# EAGLE board UpTo11.FrontPanel (EAGLE 9.6.2)
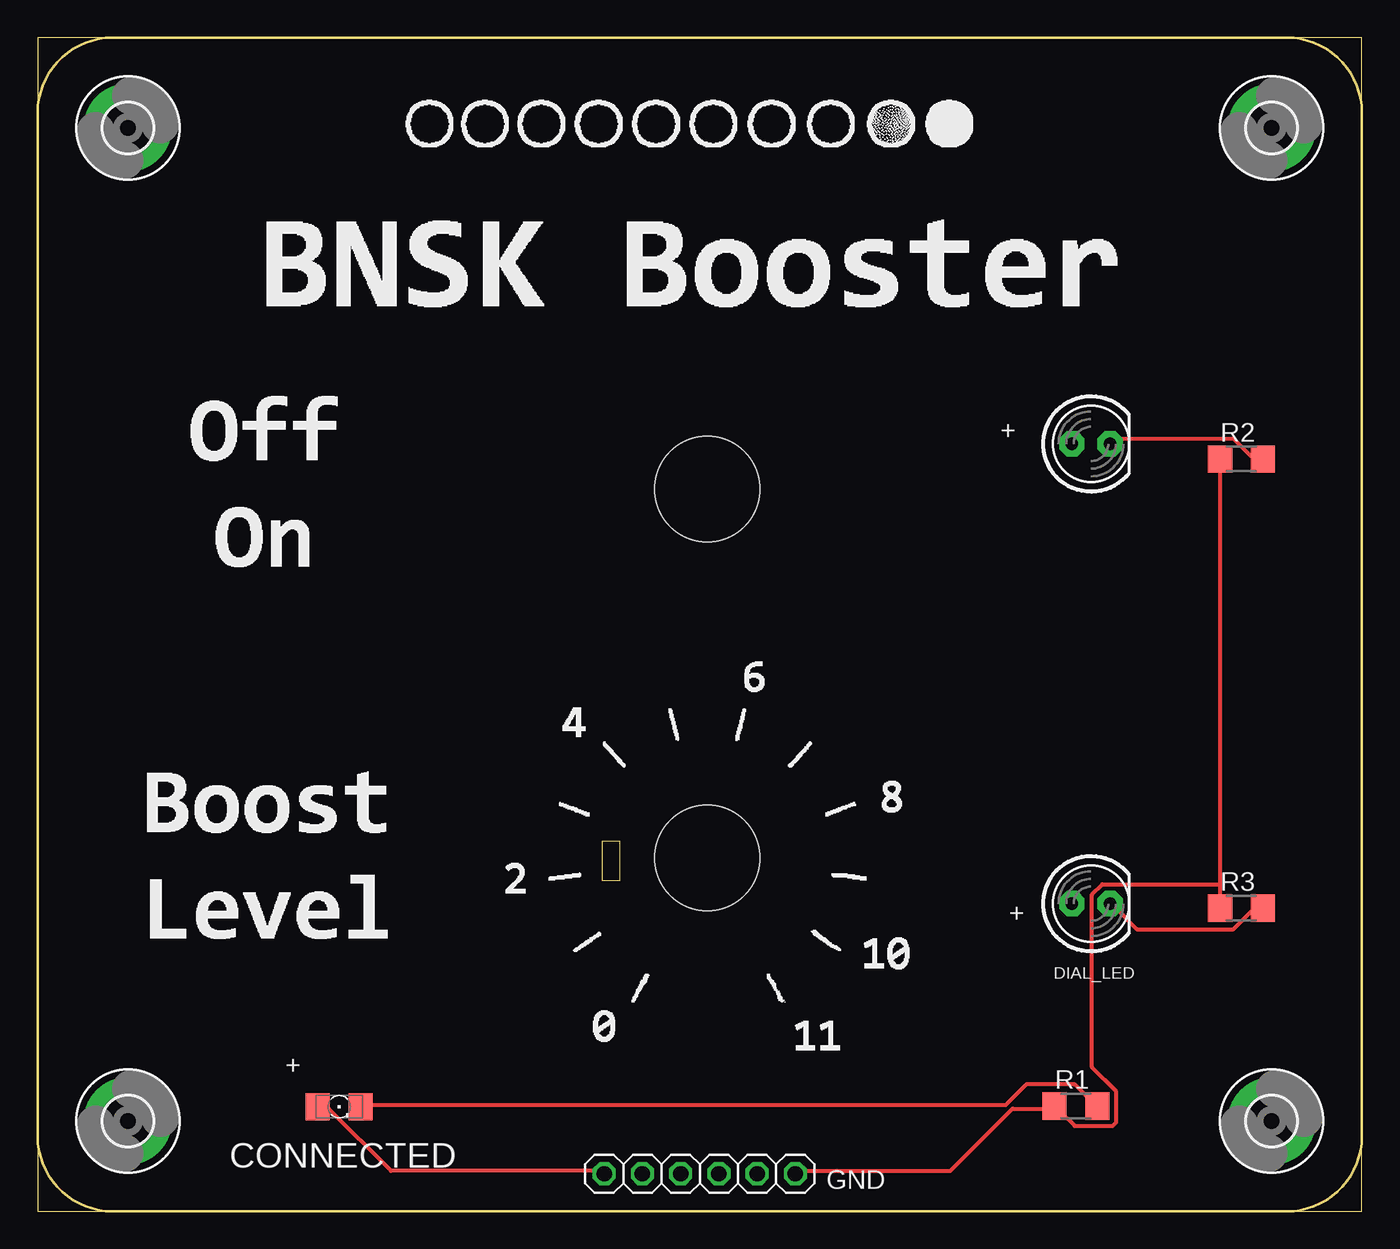
[diagram p0: board, top side]
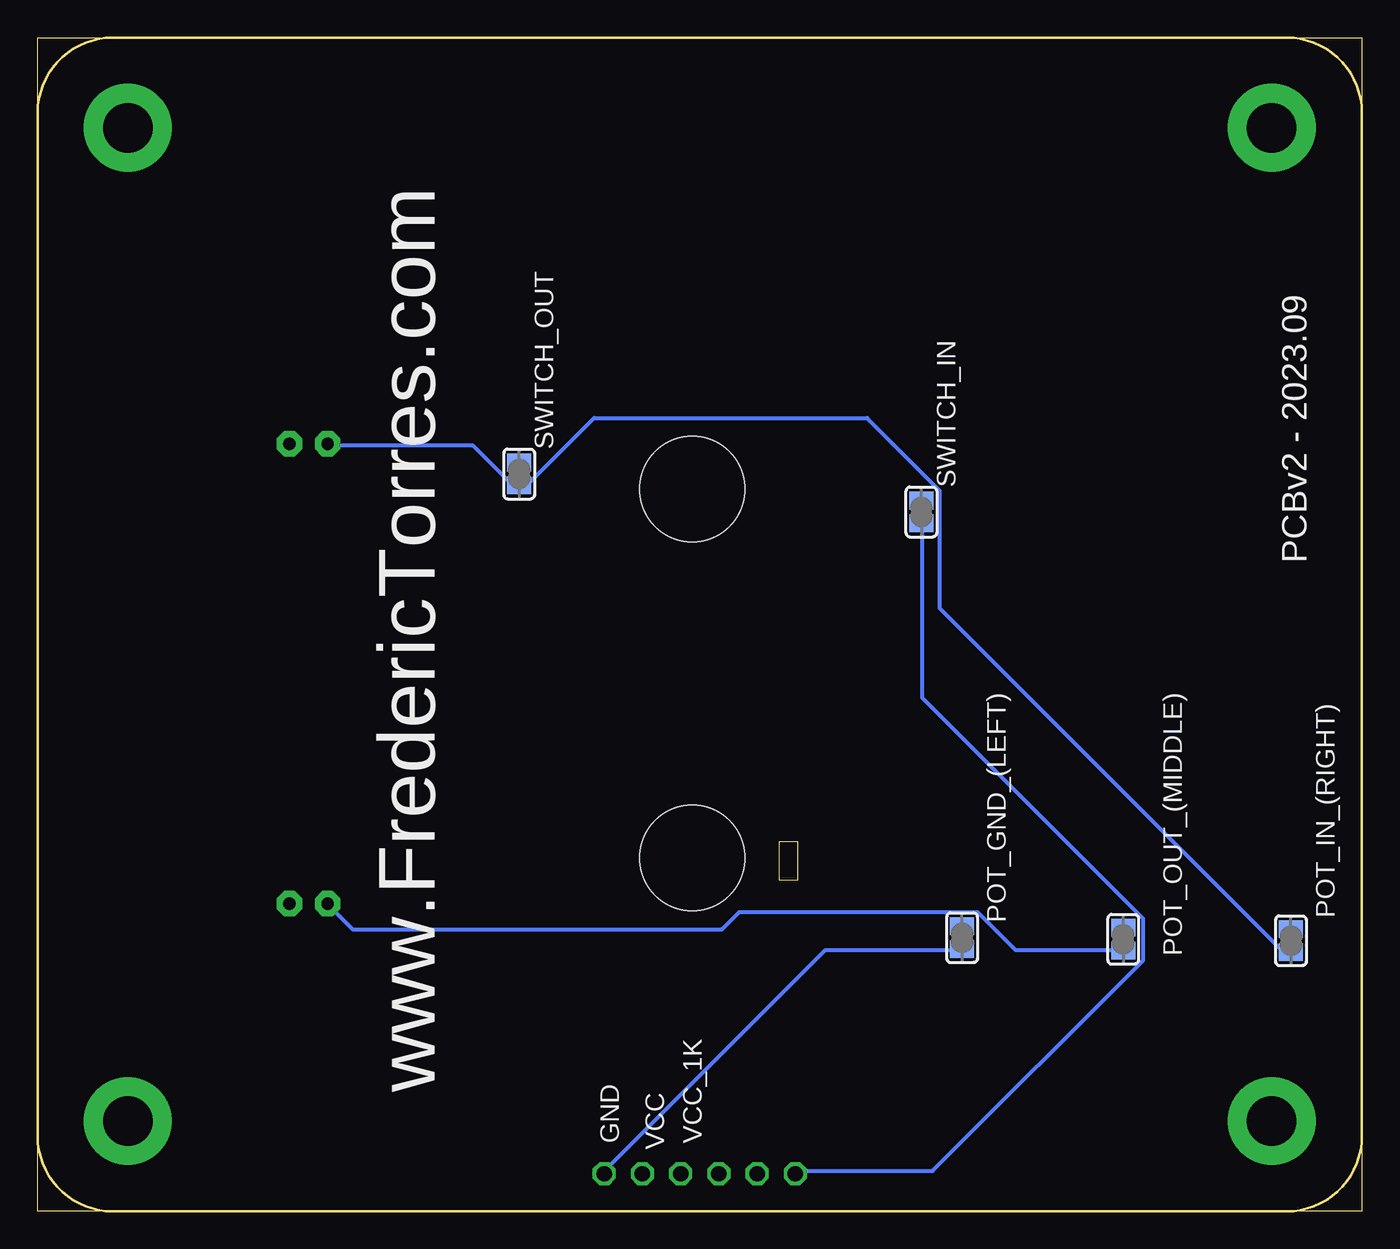
[diagram p1: board, bottom side, seen from below]

Size 88 x 78 mm. Coordinates in mm from the lower left corner, seen from the top.
Outline: 5,0 0,0 0,5
Outline: 83,0 88,0 88,5
Outline: 88,73 88,78 83,78
Outline: 5,78 0,78 0,73
Outline: 0,5 0,73
Outline: 0,73 arc-90 5,78
Outline: 5,78 83,78
Outline: 83,78 arc-90 88,73
Outline: 88,73 88,5
Outline: 88,5 arc-90 83,0
Outline: 83,0 5,0
Outline: 5,0 arc-90 0,5
Copper layers (1*16): Top 0.035mm / dielectric 1.5mm / Bottom 0.035mm
Design rules "default": minimum track width 10mil, minimum drill 24mil, track to track 8mil, track to pad 8mil, pad to pad 8mil, via to via 8mil, smd to smd 8mil, copper to edge 40mil, drill to drill 8mil, minimum pad ring 10mil, minimum via ring 8mil, stop-mask expansion 4mil, vias tented up to drill 0mil, thermal gap 10mil
Net classes: 0 default: clearance 0.205 mm
Holes 7 mm at 44.5,23.5 44.5,48
Milling: area 37.5,22 to 38.7,24.6

## Footprints (pad centres in the part's own frame; a part is rotated, then mirrored left to right if it is on the bottom)
LED5MM = drill 0.813 pad 1.676 octagon: A -1.27,0; K 1.27,0
1206 = smd 1.6 x 1.803: A -1.422,0; C 1.422,0
1X06 = drill 1.016 octagon: 1 -6.35,0; 2 -3.81,0; 3 -1.27,0; 4 1.27,0; 5 3.81,0; 6 6.35,0
3,3-PAD = drill 3.3 pad 5.842: B3,3 0,0
SOLDERJUMPER_REFLOW = smd 1.168 x 1.6: 1 -0.762,0; 2 0.762,0
R1206 = smd 1.6 x 1.803: 1 -1.422,0; 2 1.422,0

## Placement (x,y rotation side)
BOOSTER_ON_LED  [LED5MM]  70,51 0 top
CONNECTED  [1206]  20.04,6.96 0 top
DIAL_LED  [LED5MM]  70,20.44 0 top
FRONT_PANEL_INTERFACE  [1X06]  44,2.5 180 top
H1  MOUNT-PAD-ROUND3.3  [3,3-PAD]  6,72 0 top
H2  MOUNT-PAD-ROUND3.3  [3,3-PAD]  82,72 0 top
H3  MOUNT-PAD-ROUND3.3  [3,3-PAD]  82,6 0 top
H4  MOUNT-PAD-ROUND3.3  [3,3-PAD]  6,6 0 top
POT_GND_(LEFT)  [SOLDERJUMPER_REFLOW]  26.57,18.18 270 bottom
POT_IN_(RIGHT)  [SOLDERJUMPER_REFLOW]  4.71,17.98 270 bottom
POT_OUT_(MIDDLE)  [SOLDERJUMPER_REFLOW]  15.86,18.08 270 bottom
R1  [R1206]  69,7 0 top
R2  [R1206]  80,50 0 top
R3  [R1206]  80,20.15 0 top
SWITCH_IN  [SOLDERJUMPER_REFLOW]  29.27,46.48 270 bottom
SWITCH_OUT  [SOLDERJUMPER_REFLOW]  56,49 270 bottom

## Library data of the parts
BOOSTER_ON_LED CONNECTED DIAL_LED FRONT_PANEL_INTERFACE R1-R3 = adafruit
H1-H4 = holes
POT_GND_(LEFT) POT_IN_(RIGHT) POT_OUT_(MIDDLE) SWITCH_IN SWITCH_OUT = microbuilder

## Nets
BOOSTER_ON: BOOSTER_ON_LED.A POT_IN_(RIGHT).2 SWITCH_OUT.2
DIAL_INPUT: DIAL_LED.A POT_OUT_(MIDDLE).2
GND_EX: FRONT_PANEL_INTERFACE.1 POT_GND_(LEFT).2 R1.1 R2.1 R3.1
N$1: CONNECTED.C R1.2
N$2: BOOSTER_ON_LED.K R2.2
N$3: DIAL_LED.K R3.2
VCC: CONNECTED.A FRONT_PANEL_INTERFACE.6 SWITCH_IN.2

## Tracks (layer width: path | path; a pad name or v marks a point on that pad's centre or on a via)
BOOSTER_ON
  Bottom 0.254: POT_IN_(RIGHT).2 4.88,17.38 5.34,17.38 28.06,40.1 28.06,47.9 32.88,52.72 51.01,52.72 55.38,48.36 55.83,48.36 SWITCH_OUT.2 56.06,48.36 56.52,48.36 59.05,50.88 68.69,50.88 BOOSTER_ON_LED.A
DIAL_INPUT
  Bottom 0.254: POT_OUT_(MIDDLE).2 15.9,17.38 23.02,17.38 25.54,19.9 41.38,19.9 42.52,18.75 67.08,18.75 68.69,20.36 DIAL_LED.A
GND_EX
  Top 0.254: 78.56,21.74 78.56,49.97 R2.1 | 78.56,21.74 78.56,20.36 R3.1 | FRONT_PANEL_INTERFACE.1 50.56,2.69 60.65,2.69 64.78,6.82 67.54,6.82 R1.1 67.77,6.82 68.92,5.67 71.44,5.67 71.67,5.9 71.67,7.97 70.06,9.57 70.06,21.05 70.75,21.74 78.56,21.74
  Bottom 0.254: POT_GND_(LEFT).2 26.69,17.38 35.64,17.38 50.33,2.69 FRONT_PANEL_INTERFACE.1
N$1
  Top 0.254: CONNECTED.C 21.64,7.05 64.33,7.05 65.7,8.43 68.92,8.43 70.29,7.05 R1.2
N$2
  Top 0.254: R2.2 81.31,50.19 80.62,50.19 79.47,51.34 71.67,51.34 71.44,51.11 BOOSTER_ON_LED.K
N$3
  Top 0.254: R3.2 81.31,20.13 80.85,20.13 79.47,18.75 73.05,18.75 71.44,20.36 DIAL_LED.K
VCC
  Top 0.254: CONNECTED.A 18.66,6.82 19.34,6.82 23.47,2.69 37.47,2.69 FRONT_PANEL_INTERFACE.6
  Bottom 0.254: SWITCH_IN.2 29.21,45.6 29.21,34.13 14.52,19.44 14.52,16.69 28.52,2.69 37.47,2.69 FRONT_PANEL_INTERFACE.6

## Text on the board
tPlace: + | + | + | GND
bNames: PCBv2 - 2023.09 | www.FredericTorres.com | VCC_1K | VCC | GND